# EAGLE board prototype_total_schematic_2355s (EAGLE 8.4.1)

Size 33.96 x 52.06 mm. Coordinates in mm from the lower left corner, seen from the top.
Outline: 0,0 33.96,0 33.96,52.06 0,52.06 0,0
Copper layers (1*16): Top 0.2mm / dielectric 1.5mm / Bottom 0.2mm
Design rules "default *": minimum track width 3.5mil, minimum drill 0.2mm, track to track 3.5mil, track to pad 3.5mil, pad to pad 6mil, via to via 6mil, smd to smd 6mil, copper to edge 40mil, drill to drill 6mil, minimum pad ring 10mil, minimum via ring 8mil, stop-mask expansion 4mil, vias tented up to drill 0mil, thermal gap 10mil

## Footprints (pad centres in the part's own frame; a part is rotated, then mirrored left to right if it is on the bottom)
0805 = smd 0.8 x 1.2: 1 -0.9,0; 2 0.9,0
EIA6032-NOM = smd 2.37 x 2.23: A 2.47,0; C -2.47,0
SOD-323 = smd 0.63 x 0.83: A 1.15,0; C -1.15,0
2X5_PTH_SILK_.05 = drill 0.432: 1 0,0; 2 0,1.27; 3 1.27,0; 4 1.27,1.27; 5 2.54,0; 6 2.54,1.27; 7 3.81,0; 8 3.81,1.27; 9 5.08,0; 10 5.08,1.27
MOLEX_48037-0001_0 = drill 0.92 pad 1.42 square: 1 3.5,10.5 | drill 0.92 pad 1.42: 2 1,10.5; 3 -1,10.5; 4 -3.5,10.5 | drill 1.1 pad 1.7 long: 5 -5.7,8.4; 6 5.7,8.4 | hole 1.1: -2.25,8.4; 2.25,8.4
1X08-3.5MM = drill 1 pad 2.184: 1 -12.25,0; 2 -8.75,0; 3 -5.25,0; 4 -1.75,0; 5 1.75,0; 6 5.25,0; 7 8.75,0; 8 12.25,0
CHIP-LED0603 = smd 0.8 x 0.8: A 0,-0.75; C 0,0.75
0603 = smd 1.1 x 1: 1 -0.85,0; 2 0.85,0
R0603 = smd 1 x 1.1: 1 -0.85,0; 2 0.85,0
5-1814400-1 = drill 1.524 pad 2.032: 1 0,0 | drill 1.6 pad 2.083: 2 -2.54,2.54; 3 -2.54,-2.54; 4 2.54,-2.54; 5 2.54,2.54
TACTILE_SWITCH_PTH_6.0MM = drill 1.016 pad 1.88: 1 -3.251,2.261; 2 3.251,2.261; 3 -3.251,-2.261; 4 3.251,-2.261
TC33X = smd 1.2 x 1.2: 1 -1,-1.825; 3 1,-1.825 | smd 1.5 x 1.6: 2 0,1.5
SO-8_S = smd 1.981 x 0.533: 1 -2.464,1.905; 2 -2.464,0.635; 3 -2.464,-0.635; 4 -2.464,-1.905; 5 2.464,-1.905; 6 2.464,-0.635; 7 2.464,0.635; 8 2.464,1.905
SSOP28DB = smd 0.348 x 1.397: 1 -4.225,-3.656; 2 -3.575,-3.656; 3 -2.925,-3.656; 4 -2.275,-3.656; 5 -1.625,-3.656; 6 -0.975,-3.656; 7 -0.325,-3.656; 8 0.325,-3.656; 9 0.975,-3.656; 10 1.625,-3.656; 11 2.275,-3.656; 12 2.925,-3.656; 13 3.575,-3.656; 14 4.225,-3.656; 15 4.225,3.656; 16 3.575,3.656; 17 2.925,3.656; 18 2.275,3.656; 19 1.625,3.656; 20 0.975,3.656; 21 0.325,3.656; 22 -0.325,3.656; 23 -0.975,3.656; 24 -1.625,3.656; 25 -2.275,3.656; 26 -2.925,3.656; 27 -3.575,3.656; 28 -4.225,3.656
DA38 = smd 1.676 x 0.356: 1 -3.67,5.85; 2 -3.67,5.2; 3 -3.67,4.55; 4 -3.67,3.9; 5 -3.67,3.25; 6 -3.67,2.6; 7 -3.67,1.95; 8 -3.67,1.3; 9 -3.67,0.65; 10 -3.67,0; 11 -3.67,-0.65; 12 -3.67,-1.3; 13 -3.67,-1.95; 14 -3.67,-2.6; 15 -3.67,-3.25; 16 -3.67,-3.9; 17 -3.67,-4.55; 18 -3.67,-5.2; 19 -3.67,-5.85; 20 3.67,-5.85; 21 3.67,-5.2; 22 3.67,-4.55; 23 3.67,-3.9; 24 3.67,-3.25; 25 3.67,-2.6; 26 3.67,-1.95; 27 3.67,-1.3; 28 3.67,-0.65; 29 3.67,0; 30 3.67,0.65; 31 3.67,1.3; 32 3.67,1.95; 33 3.67,2.6; 34 3.67,3.25; 35 3.67,3.9; 36 3.67,4.55; 37 3.67,5.2; 38 3.67,5.85

## Placement (x,y rotation side)
C13  100nF  [0805]  7.62,33.02 90 top
C14  22uF  [0805]  6.35,29.21 180 top
C15  470n  [0805]  8.89,36.83 180 top
C16  100n  [0805]  6.35,44.45 180 top
C17  1000p  [0805]  2.54,27.94 90 top
C18  10µF  [EIA6032-NOM]  6.35,24.13 0 top
D1  3.3V  [SOD-323]  8.89,40.64 0 top
J1  [2X5_PTH_SILK_.05]  5.08,13.97 90 top
J2  MOLEX_48037-0001MOLEX_48037-0001_0_0  [MOLEX_48037-0001_0]  17.78,-5.08 0 top
JP2  [1X08-3.5MM]  30.48,16.51 90 top
LED3  [CHIP-LED0603]  3.81,36.83 90 top
R17  1k  [0603]  16.51,39.37 180 top
R18  47k  [0603]  3.81,33.02 90 top
R20  330  [R0603]  3.81,40.64 0 top
R25  330  [R0603]  11.43,15.24 180 top
RIGHT_ANGLE_SMA_MALE  5-1814400-1  [5-1814400-1]  27.94,46.99 270 top
RXLED  [CHIP-LED0603]  11.43,20.32 90 top
S2  [TACTILE_SWITCH_PTH_6.0MM]  6.35,5.08 180 bottom
TM2  [TC33X]  11.43,45.72 0 top
TXLED  [CHIP-LED0603]  11.43,17.78 90 top
U1  LTC1069-7CS8#PBF  [SO-8_S]  17.78,44.45 180 top
U2  FT232RL-BASICSSOP  [SSOP28DB]  20.32,16.51 90 top
U$5  MSP430FR2355  [DA38]  17.78,30.48 0 top

## Library data of the parts
C13-C17 = SparkFun-Capacitors; PROD_ID: CAP-08402
C18 = SparkFun-Capacitors; PROD_ID: CAP-12984
D1 = SparkFun-DiscreteSemi; PROD_ID: DIO-11284
J1 = SparkFun-Connectors
J2 = TTE; CENTROID_NOT_SPECIFIED: No; DATASHEET: http://www.molex.com/elqNow/elqRedir.htm?ref=http://www.molex.com/pdm_docs/sd/480370001_sd.pdf; DIGIKEY_DESCRIPTION: CONN PLUG USB 4POS RT ANG PCB; DIGIKEY_PART_NUMBER: WM17117-ND; IMPORTED_FROM: octopart; IS_FEMALE: yes; LEAD_FREE: yes; MF: Molex; MOUSER_PART_NUMBER: 538-48037-0001; MPN: 48037-0001; NUM_PINS: 2; OCTOPART_PART_NUMBER: 6671af1c981eb9b6; PACKAGE: CONN_USB_PTH_18MM8_12MM0; PREFIX: J; ROHS: yes; TEMPERATURE_RANGE_HIGH: +85°C; TEMPERATURE_RANGE_LOW: -20°C
JP2 TM2 = adafruit
LED3 RXLED TXLED = led
R17 R18 = SparkFun-Resistors; PROD_ID: RES-08296
R20 R25 = rcl
RIGHT_ANGLE_SMA_MALE = TTE; MANUFACTURER_PART_NUMBER: 518144001; VENDOR: TE Connectivity
S2 = SparkFun-Switches; PROD_ID: SWCH-08441; SF_SKU: COM-00097
U1 = TTE; DESCRIPTION: LTC1069-7 - Linear Phase 8th Order Lowpass Filter; DIGI-KEY_PART_NUMBER: LTC1069-7CS8#PBF-ND; DIGI-KEY_PURCHASE_URL: https://www.digikey.com/product-detail/en/linear-technology-analog-devices/LTC1069-7CS8-PBF/LTC1069-7CS8-PBF-ND/889060?utm_source=snapeda&utm_medium=aggregator&utm_campaign=symbol; MF: Linear Technology; MP: LTC1069-7CS8#PBF; PACKAGE: SOIC-8 Linear Technology
U2 = SparkFun
U$5 = TTE

## Nets
!RTS!_JTAG_TCK: J1.7 U2.3 U$5.8
ADC: U$5.5 U$5.6
ANTENNA_SIG: D1.C JP2.8 RIGHT_ANGLE_SMA_MALE.1 TM2.1 U$5.38
ANTENNA_TX_SIG: TM2.2 U$5.34
FILTER_CLK: R17.1 U$5.26
FILTER_IN: U1.4 U$5.30
FILTER_OUT: U1.8 U$5.32
GND: C13.2 C14.2 C15.1 C16.1 C17.2 C18.C D1.A J1.3 J1.5 J1.9 J2.4 J2.5 J2.6 JP2.7 LED3.C S2.1 U1.3 U1.6 U1.7 U2.7 U2.18 U2.21 U2.25 U2.26 U$5.11
JTAG_TCK: J1.4 U$5.31
N$1: R17.2 U1.5
N$3: C15.2 U1.1
N$19: LED3.A R20.1
N$20: RXLED.C U2.22
N$21: TXLED.C U2.23
N$22: R25.1 RXLED.A TXLED.A
P3.0/MCLK: U$5.3
P3.6/OA3-: U$5.33
RESET_JTAG_RESET: C17.1 J1.10 R18.1 S2.3 U2.2 U$5.9
RX_PGA_1: U$5.2 U$5.4
STATUS_LED: R20.2 U$5.15
UART_BSL_RX_JTAG_DIN: J1.8 U2.1 U$5.21 U$5.29
UART_BSL_TX_JTAG_DOUT: J1.6 U2.5 U$5.20 U$5.28
USB_DATA_+: J2.2 U2.15
USB_DATA_-: J2.3 U2.16
V_USB: J2.1 U2.20
VCC: C13.1 C14.1 C16.2 C18.A J1.1 R18.2 R25.2 U1.2 U$5.10
VCC_3V3: U2.4 U2.17

## Tracks (layer width: path | path; a pad name or v marks a point on that pad's centre or on a via)
!RTS!_JTAG_TCK  (2 unrouted)
ADC  (1 unrouted)
ANTENNA_SIG  (4 unrouted)
ANTENNA_TX_SIG  (1 unrouted)
FILTER_CLK  (1 unrouted)
FILTER_IN  (1 unrouted)
FILTER_OUT  (1 unrouted)
GND  (24 unrouted)
JTAG_TCK  (1 unrouted)
N$1  (1 unrouted)
N$3  (1 unrouted)
N$19  (1 unrouted)
N$20  (1 unrouted)
N$21  (1 unrouted)
N$22  (2 unrouted)
RESET_JTAG_RESET  (5 unrouted)
RX_PGA_1  (1 unrouted)
STATUS_LED  (1 unrouted)
UART_BSL_RX_JTAG_DIN  (3 unrouted)
UART_BSL_TX_JTAG_DOUT  (3 unrouted)
USB_DATA_+  (1 unrouted)
USB_DATA_-  (1 unrouted)
V_USB  (1 unrouted)
VCC  (8 unrouted)
VCC_3V3  (1 unrouted)